# EAGLE board mainboard (EAGLE 5.07)

Size 160 x 100 mm. Coordinates in mm from the lower left corner, seen from the top.
Outline: 0,0 160,0 160,100 0,100 0,0
Copper layers (1*16): Top 0.035mm / dielectric 1.5mm / Bottom 0.035mm
Design rules "default": minimum track width 10mil, minimum drill 24mil, track to track 8mil, track to pad 8mil, pad to pad 8mil, via to via 8mil, smd to smd 8mil, copper to edge 40mil, drill to drill 8mil, minimum pad ring 10mil, minimum via ring 8mil, stop-mask expansion 4mil, vias tented up to drill 0mil, thermal gap 10mil

## Footprints (pad centres in the part's own frame; a part is rotated, then mirrored left to right if it is on the bottom)
C025-050X025 = drill 0.813 pad 1.676 octagon: 1 -1.27,0; 2 1.27,0
CE-020X050 = drill 0.813 long: + -0.953,0; - 0.953,0
C025-040X018 = drill 0.813 pad 1.422 octagon: 1 -1.27,0; 2 1.27,0
DIL40 = drill 0.813 long: 1 -24.13,-7.62; 2 -21.59,-7.62; 3 -19.05,-7.62; 4 -16.51,-7.62; 5 -13.97,-7.62; 6 -11.43,-7.62; 7 -8.89,-7.62; 8 -6.35,-7.62; 9 -3.81,-7.62; 10 -1.27,-7.62; 11 1.27,-7.62; 12 3.81,-7.62; 13 6.35,-7.62; 14 8.89,-7.62; 15 11.43,-7.62; 16 13.97,-7.62; 17 16.51,-7.62; 18 19.05,-7.62; 19 21.59,-7.62; 20 24.13,-7.62; 21 24.13,7.62; 22 21.59,7.62; 23 19.05,7.62; 24 16.51,7.62; 25 13.97,7.62; 26 11.43,7.62; 27 8.89,7.62; 28 6.35,7.62; 29 3.81,7.62; 30 1.27,7.62; 31 -1.27,7.62; 32 -3.81,7.62; 33 -6.35,7.62; 34 -8.89,7.62; 35 -11.43,7.62; 36 -13.97,7.62; 37 -16.51,7.62; 38 -19.05,7.62; 39 -21.59,7.62; 40 -24.13,7.62
DIL16 = drill 0.813 long: 1 -8.89,-3.81; 2 -6.35,-3.81; 3 -3.81,-3.81; 4 -1.27,-3.81; 5 1.27,-3.81; 6 3.81,-3.81; 7 6.35,-3.81; 8 8.89,-3.81; 9 8.89,3.81; 10 6.35,3.81; 11 3.81,3.81; 12 1.27,3.81; 13 -1.27,3.81; 14 -3.81,3.81; 15 -6.35,3.81; 16 -8.89,3.81
AVR-ISP-6 = drill 1.016 square: 1 -2.54,-1.27 | drill 1.016 octagon: 2 -2.54,1.27; 3 0,-1.27; 4 0,1.27; 5 2.54,-1.27; 6 2.54,1.27
LED3MM = drill 0.813 octagon: A -1.27,0; K 1.27,0
QS = drill 0.61 long: 1 -2.54,0; 2 2.54,0
0207/10 = drill 0.813 octagon: 1 -5.08,0; 2 5.08,0
B3F-10XX = drill 1.016 long: 1 -3.251,2.261; 2 3.251,2.261; 3 -3.251,-2.261; 4 3.251,-2.261

## Placement (x,y rotation side)
C1  22n  [C025-050X025]  -10.16,36.83 0 top  (outside the outline)
C2  22n  [C025-050X025]  -19.05,50.8 0 top  (outside the outline)
C3  100n  [C025-050X025]  16.51,36.83 0 top
C4  100n  [CE-020X050]  -31.75,36.83 0 top  (outside the outline)
C5  100n  [CE-020X050]  -40.64,36.83 0 top  (outside the outline)
C6  100n  [C025-040X018]  7.62,36.83 0 top
C7  100n  [C025-040X018]  -1.27,36.83 0 top
IC1  mega1284P-PU  [DIL40]  82.55,50.8 270 top
IC2  MAX232  [DIL16]  118.11,67.31 270 top
JP1  AVR-ISP-6  [AVR-ISP-6]  -53.34,25.4 0 top  (outside the outline)
LED1  rot  [LED3MM]  -20.32,45.72 0 top  (outside the outline)
Q1  20MHz  [QS]  -19.05,38.1 0 top  (outside the outline)
R1  330  [0207/10]  -50.8,34.29 0 top  (outside the outline)
S1  Reset  [B3F-10XX]  -41.91,26.67 0 top  (outside the outline)

## Library data of the parts
C1-C7 = rc-master
IC1 = avr-5
IC2 = maxim
JP1 = avr-6
LED1 = led
Q1 = special
R1 = resistor
S1 = switch-omron

## Nets
+5V: JP1.2
AREF: IC1.32
AVCC: IC1.30
GND: C1.1 C2.1 C3.1 C7.1 IC1.11 IC1.31 IC2.15 JP1.6 LED1.K S1.3 S1.4
MISO: IC1.7 JP1.1
MOSI: IC1.6 JP1.4
N$1: C1.2 IC1.12 Q1.2
N$2: C4.+ IC2.1
N$3: LED1.A R1.1
N$4: C4.- IC2.3
N$5: C2.2 IC1.13 Q1.1
N$6: C5.+ IC2.4
N$7: C5.- IC2.5
N$8: C6.2 IC2.2
N$9: C7.2 IC2.6
RST: IC1.9 JP1.5 S1.1 S1.2
RX0: IC1.14 IC2.12
SCK: IC1.8 JP1.3
TX0: IC1.15 IC2.11
VCC: C3.2 C6.1 IC1.10 IC2.16 R1.2

## Tracks (layer width: path | path; a pad name or v marks a point on that pad's centre or on a via)
GND  (10 unrouted)
MISO  (1 unrouted)
MOSI  (1 unrouted)
N$1  (2 unrouted)
N$2  (1 unrouted)
N$3  (1 unrouted)
N$4  (1 unrouted)
N$5  (2 unrouted)
N$6  (1 unrouted)
N$7  (1 unrouted)
N$8  (1 unrouted)
N$9  (1 unrouted)
RST  (3 unrouted)
RX0  (1 unrouted)
SCK  (1 unrouted)
TX0  (1 unrouted)
VCC  (4 unrouted)